# Altium PCB Starboard Deployable Solar Panel.PcbDoc (part 2 of 2)
Units mm, origin at the board's own origin, x right, y up, seen from the top; angles counter-clockwise.
Board outline 327.5 x 81 mm, 2 copper layers (Top Layer, Bottom Layer), stack 1.58 mm thick; 55 components, 32 nets, 178 pads, 1774 vias.
Unrouted connection lines stored in the file: 37.
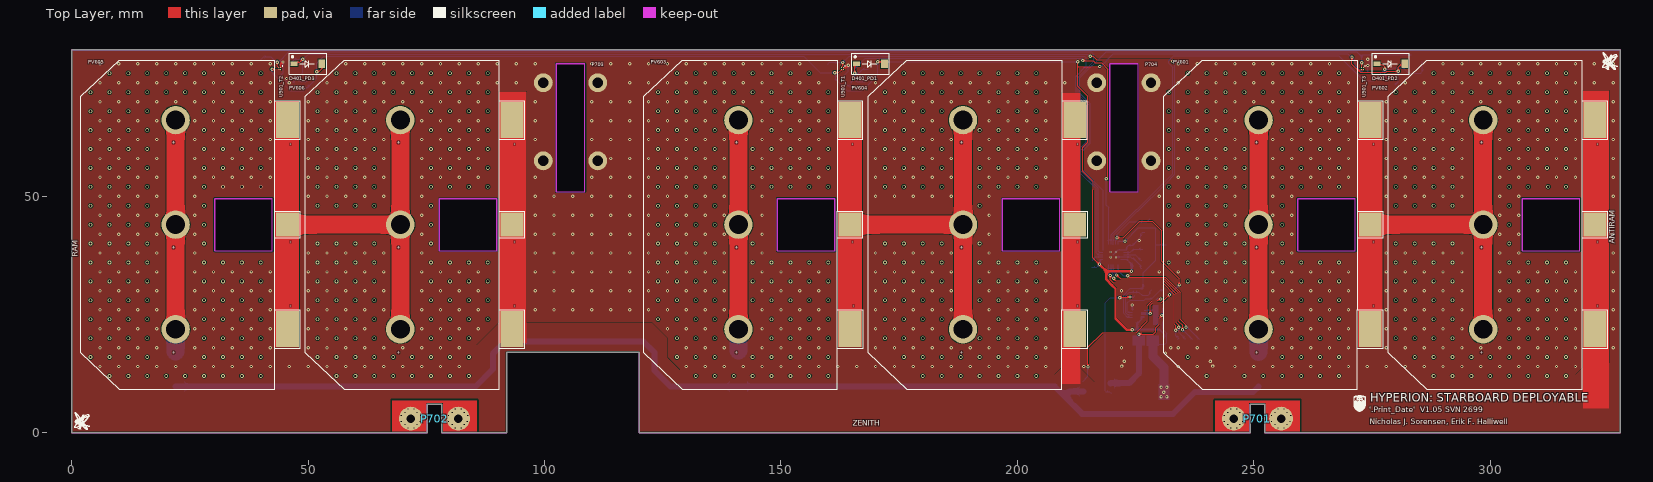
[diagram p0: Top Layer view]

## Silkscreen, mask and mechanical layers (free items; w line width, h text height) (continued)
Bottom Overlay: (continued)
  text "VStarD+" at 226.94,12.2 h0.7 r90
  text "VStarD-" at 228.41,12.2 h0.7 r90
  text "VStarD-" at 229.88,12.2 h0.7 r90
  text "3V3" at 231.35,12.2 h0.7 r90
  text "SPI_CLK" at 234.29,12.2 h0.7 r90
  text "SPI_MISO" at 235.76,12.2 h0.7 r90
  text "SPI_MOSI" at 237.23,12.2 h0.7 r90
  text "ADC_SPI_nCS_SD" at 238.7,12.2 h0.7 r90
  text "ZENITH" at 173.3,1.1 h2
Mechanical 1:
  lines w0.254: 327.47,0 252.26,0 252.26,5.94 252.21,5.99 249.25,5.99 249.25,0.01 120,0.01 120,17 92,17 92,0.01 78.23,0.01 78.23,5.99 75.26,5.99 75.24,5.97 75.24,0 0,0 0,81 327.5,81 327.5,-0.01 ; 30.25,38.5 30.25,49.5 42.45,49.5 42.45,38.5 30.25,38.5 ; 77.75,38.5 77.75,49.5 89.95,49.5 89.95,38.5 77.75,38.5 ; 102.5,51 102.5,78 108.5,78 108.5,51 102.5,51 ; 149.25,38.5 149.25,49.5 161.45,49.5 161.45,38.5 149.25,38.5 ; 196.75,38.5 196.75,49.5 208.95,49.5 208.95,38.5 196.75,38.5 ; 219.5,51 219.5,78 225.5,78 225.5,51 219.5,51 ; 259.25,38.5 259.25,49.5 271.45,49.5 271.45,38.5 259.25,38.5 ; 306.75,38.5 306.75,49.5 318.95,49.5 318.95,38.5 306.75,38.5
Top Assembly:
  lines w0.254: 327.47,0 252.26,0 252.26,5.94 252.21,5.99 249.25,5.99 249.25,0.01 120,0.01 120,18 92,18 92,0.01 78.23,0.01 78.23,5.99 75.26,5.99 75.24,5.97 75.24,0 0,0 ; 0,0 0,81.008 327.5,80.998 327.5,-0.01 327.5,81.001 0,81.001 0,0 ; 102.5,51 102.5,78 108.5,78 108.5,51 102.5,51 ; 219.5,51 219.5,78 225.5,78 225.5,51 219.5,51

## Text inside footprints (layer, text, board x,y; h text height)
PV601: Top Overlay "+" at 250.365,17.33 h0.7 r270; Top Overlay "+" at 250.365,39.555 h0.7 r270; Top Overlay "+" at 250.365,61.78 h0.7 r270; Top Overlay "-" at 275.028,26.906 h0.7 r270; Top Overlay "-" at 275,40.444 h0.7 r270; Top Overlay "-" at 275,61.145 h0.7 r270
PV602: Top Overlay "+" at 297.865,17.33 h0.7 r270; Top Overlay "+" at 297.865,39.555 h0.7 r270; Top Overlay "+" at 297.865,61.78 h0.7 r270; Top Overlay "-" at 322.528,26.906 h0.7 r270; Top Overlay "-" at 322.5,40.444 h0.7 r270; Top Overlay "-" at 322.5,61.145 h0.7 r270
PV603: Top Overlay "+" at 140.365,17.33 h0.7 r270; Top Overlay "+" at 140.365,39.555 h0.7 r270; Top Overlay "+" at 140.365,61.78 h0.7 r270; Top Overlay "-" at 165.028,26.906 h0.7 r270; Top Overlay "-" at 165,40.444 h0.7 r270; Top Overlay "-" at 165,61.145 h0.7 r270
PV604: Top Overlay "+" at 187.865,17.33 h0.7 r270; Top Overlay "+" at 187.865,39.555 h0.7 r270; Top Overlay "+" at 187.865,61.78 h0.7 r270; Top Overlay "-" at 212.528,26.906 h0.7 r270; Top Overlay "-" at 212.5,40.444 h0.7 r270; Top Overlay "-" at 212.5,61.145 h0.7 r270
PV605: Top Overlay "+" at 21.365,17.33 h0.7 r270; Top Overlay "+" at 21.365,39.555 h0.7 r270; Top Overlay "+" at 21.365,61.78 h0.7 r270; Top Overlay "-" at 46.028,26.906 h0.7 r270; Top Overlay "-" at 46,40.444 h0.7 r270; Top Overlay "-" at 46,61.145 h0.7 r270
PV606: Top Overlay "+" at 68.865,17.33 h0.7 r270; Top Overlay "+" at 68.865,39.555 h0.7 r270; Top Overlay "+" at 68.865,61.78 h0.7 r270; Top Overlay "-" at 93.528,26.906 h0.7 r270; Top Overlay "-" at 93.5,40.444 h0.7 r270; Top Overlay "-" at 93.5,61.145 h0.7 r270